# Altium PCB 下板20201119.PCBDOC
Units mm, origin at the board's own origin, x right, y up, seen from the top; angles counter-clockwise.
Board outline 146 x 45 mm, 2 copper layers (Top Layer, Bottom Layer); 4 components, 41 nets, 122 pads, 0 vias.
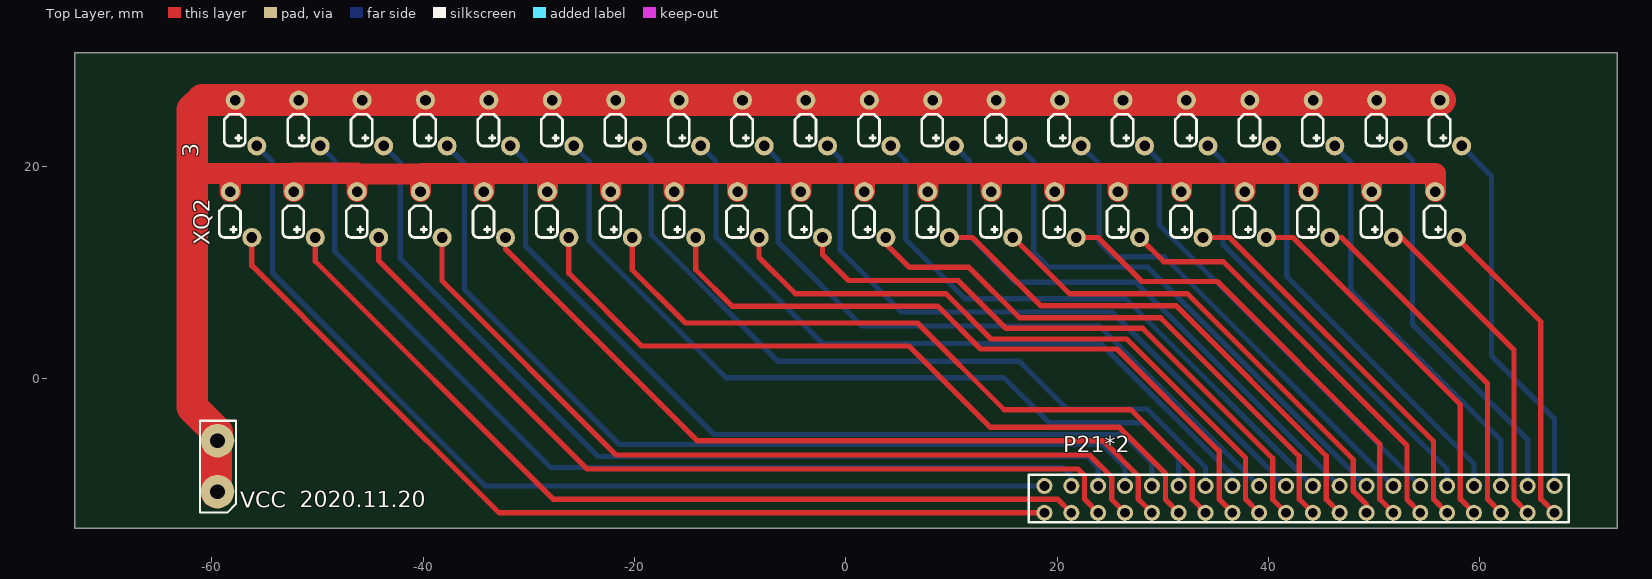
[diagram p0: Top Layer view]
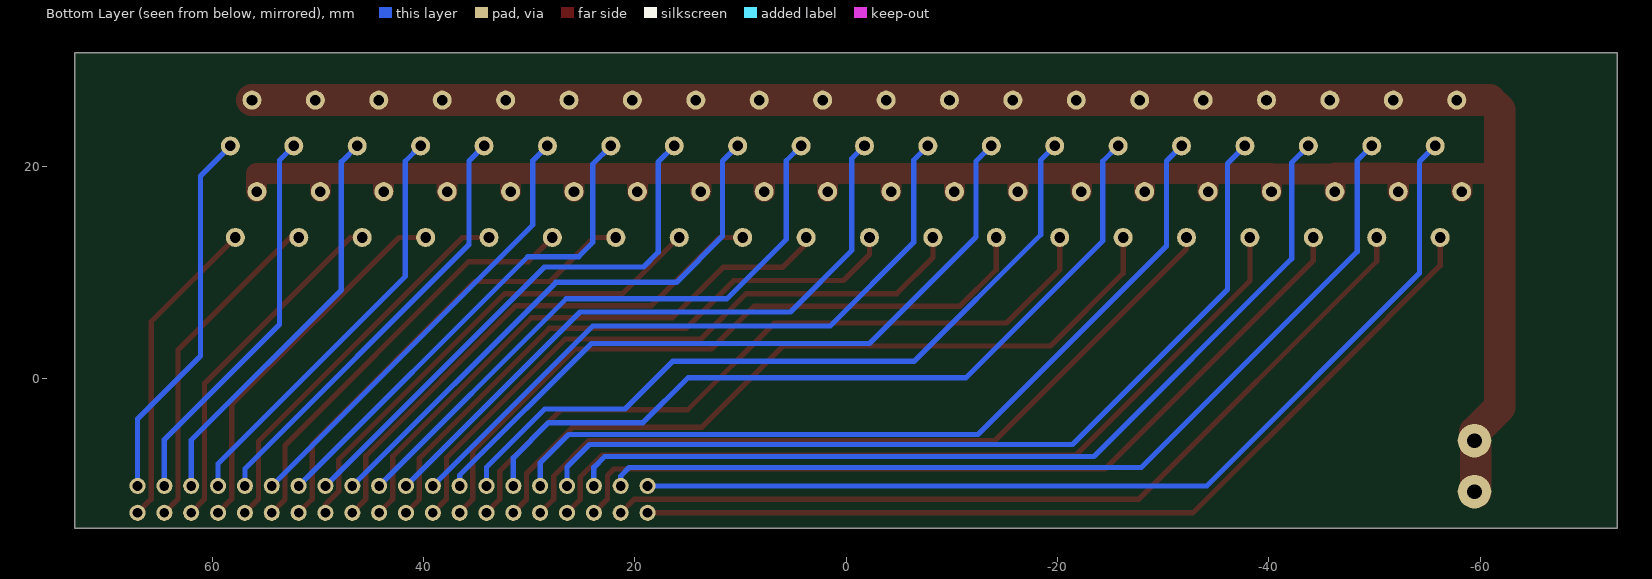
[diagram p1: Bottom Layer view, seen from below]

## Layer stack, top to bottom
Top Solder: solder mask 0.0102, Solder Resist, Dk 3.5
Top Layer: signal copper 0.0356
Dielectric1: dielectric 0.32, FR-4, Dk 4.8
Bottom Layer: signal copper 0.0356
Bottom Solder: solder mask 0.0102, Solder Resist, Dk 3.5

## Board outline
-72.978,-14.199 73.022,-14.199 73.022,30.798 73.023,30.799 -72.977,30.799 -72.978,30.801

## Design rules (kind name [scope] priority, off if disabled: settings)
Clearance [All] p1: gap=0.3 ignorepadtopadclearanceinfootprint=FALSE except(0: Arc-Hole Track-Hole SMDPad-Hole THPad-Hole Via-Hole Fill-Hole Poly-Hole Region-Hole Text-Hole)
FabricationTestPointUsage TestPointUsage [All] p1: valid=0 allowmultiple=FALSE
FabricationTestpoint Testpoint [All] p1: side=3 testpointundercomponent=TRUE minsize=1.016 maxsize=2.54 preferedsize=1.524 minholesize=0 maxholesize=1.016 preferedholesize=0.813 testpointgrid=0.025 allowsidetop=TRUE allowsidebottom=TRUE usegrid=TRUE gridtolerance=0
PolygonConnect [All] p1: connectstyle=Relief reliefconductorwidth=0.254 reliefentries=4 polygonreliefangle="90 Angle" airgapwidth=0.254
RoutingVias [All] p1: holewidth=0.8 width=1.6 viastyle="Through Hole" minholewidth=0.711 minwidth=1.27 maxholewidth=0.711 maxwidth=1.27
SilkToSolderMaskClearance SilkscreenOverComponentPads [IsPad] p1: minsilkscreentomaskgap=0.254 clearancetoexposedcopper=TRUE
SolderMaskExpansion [All] p1: expansion=0.102
Width Width_1 [All] p1: maxlimit=1.27 minlimit=0.254 preferedwidth=0.381 minimp=50.000000 maximp=50.000000 favimp=50.000000
Width [InNet('GND')] p2: maxlimit=1.27 minlimit=0.254 preferedwidth=0.381
27 further rules are at their usual default settings.

## Components (designator, comment, footprint, x,y, rotation, side; value= is the part's Value field where it differs from the comment)
3 "Header 20X2" XIANQUAN1 58.272,21.96 r180 top (schematic designator XQ1)
P21*2 "Header 21X2" XinPian 18.8,-12.751 r180 top
XQ2 "Header 20X2" XIANQUAN1 57.8,13.3 r180 top
? "" N1A -59.45,-5.925 r180 top

## Footprints (in the part's own frame and the unit in brackets; to place one, negate y for a bottom-side part, rotate by r counter-clockwise, add the part's x,y. Pads: shape width x height; smd on the part's side, far side on the other; paste and mask are expansions set on the pad)
N1A [mil]
  round 125 hole 55: 1(0,0) 2(0,190)
  silkscreen extent -69,-74 65,268
XIANQUAN1 [mm]
  round 1.8 hole 1: 1(2.04,-4.34) 2(0,0) 3(8.04,-4.34) 4(6,0) 5(14.04,-4.34) 6(12,0) 7(20.04,-4.34) 8(18,0) 9(26.04,-4.34) 10(24,0) 11(32.04,-4.34) 12(30,0) 13(38.04,-4.34) 14(36,0) 15(44.04,-4.34) 16(42,0) 17(50.04,-4.34) 18(48,0) 19(56.04,-4.34) 20(54,0) 21(62.04,-4.34) 22(60,0) 23(68.04,-4.34) 24(66,0) 25(74.04,-4.34) 26(72,0) 27(80.04,-4.34) 28(78,0) 29(86.04,-4.34) 30(84,0) 31(92.04,-4.34) 32(90,0) 33(98.04,-4.34) 34(96,0) 35(104.04,-4.34) 36(102,0) 37(110.04,-4.34) 38(108,0) 39(116.04,-4.34) 40(114,0)
  silkscreen extent 1.08,-3 117.08,0
XinPian [mil]
  round 60 hole 36: 1(0,-100) 2(-100,-100) 3(-200,-100) 4(-300,-100) 5(-400,-100) 6(-500,-100) 7(-600,-100) 8(-700,-100) 9(-800,-100) 10(-900,-100) 11(-1000,-100) 12(-1100,-100) 13(-1200,-100) 14(-1300,-100) 15(-1400,-100) 16(-1500,-100) 17(-1600,-100) 18(-1700,-100) 19(-1800,-100) 20(-1900,-100) 21(-1900,0) 22(-1800,0) 23(-1700,0) 24(-1600,0) 25(-1500,0) 26(-1400,0) 27(-1300,0) 28(-1200,0) 29(-1100,0) 30(-1000,0) 31(-900,0) 32(-800,0) 33(-700,0) 34(-600,0) 35(-500,0) 36(-400,0) 37(-300,0) 38(-200,0) 39(-100,0) 40(0,0)
  silkscreen extent -1953,-142 59,35

## Part data
3 XQ2: "Header, 20-Pin, Dual row"
P21*2: library part "Header 22X2", "Header, 22-Pin, Dual row"

## Nets (pads, with @x,y where several pads share a name; then routed paths per layer and width w, separated by ;. In a path a pad name is that pad's centre, name@x,y a point inside that pad or via, vN(x,y) a via of type N, cw(c..) or ccw(c..) an arc to the next point about the centre after c; other vN are vias at no path point)
GND: 3.1 3.3 3.5 3.7 3.9 3.11 3.13 3.15 3.17 3.19 3.21 3.23 3.25 3.27 3.29 3.31 3.33 3.35 3.37 3.39 ?.1 ?.2 XQ2.1 XQ2.3 XQ2.5 XQ2.7 XQ2.9 XQ2.11 XQ2.13 XQ2.15 XQ2.17 XQ2.19 XQ2.21 XQ2.23 XQ2.25 XQ2.27 XQ2.29 XQ2.31 XQ2.33 XQ2.35 XQ2.37 XQ2.39 | length 306.9
  Top Layer w1.27: ?.2@-59.575,-10.792 ?.2@-59.406,-10.961 ; ?.1@-59.5,-6.464 ?.1@-59.5,-5.075 ; ?.1@-59.3,-7.053 ?.1@-58.946,-6.699 ; -52.24,19.37 -52.235,19.375 ; -46.24,18.885 -45.805,19.32 ; -46.24,19.375 -45.805,19.375 ; -40.24,19.32 -40.19,19.37 ; -28.305,19.37 -28.24,19.305 ; XQ2.29@-28.25,17.65 XQ2.29 ; XQ2.1 XQ2.1@55.795,17.675
  Top Layer w2: -61.73,19.37 -58.24,19.37 ; XQ2.39 -58.24,19.37 ; XQ2.37 -52.24,19.37 -58.24,19.37 ; -52.235,19.375 -46.24,19.375 ; XQ2.35 -46.24,18.885 ; -45.805,19.32 -40.24,19.32 XQ2.33 ; -40.19,19.37 -34.24,19.37 ; XQ2.31 -34.24,19.37 ; XQ2.29 -28.24,19.305 ; XQ2.27 -22.24,19.22 ; XQ2.25 -16.24,19.25 ; XQ2.23 -10.24,19.37 ; XQ2.21 -4.24,19.37 ; XQ2.19 1.76,19.285 ; XQ2.17 7.76,19.26 ; XQ2.15 13.76,19.155 ; XQ2.13 19.76,19.355 ; XQ2.11 25.76,19.335 ; XQ2.9 31.76,18.935 ; XQ2.7 37.76,19.37 ; XQ2.5@43.8,17.68 43.8,19.35 ; 49.425,19.37 43.8,19.37 37.76,19.37 ; XQ2.3 49.76,19.035 ; 49.76,19.37 55.795,19.37 XQ2.1@55.795,17.675 ; -34.24,19.37 -28.305,19.37 -22.24,19.37 -16.24,19.37 -10.24,19.37 ; -10.24,19.37 -4.24,19.37 ; -4.24,19.37 1.76,19.37 7.76,19.37 13.76,19.37 19.76,19.37 25.76,19.37 31.76,19.37 37.76,19.37
  Top Layer w3: ?.2@-59.575,-10.792 ?.1@-59.575,-6.279 ; ?.1@-59.5,-5.075 -61.825,-2.75 -61.825,19.37 -61.825,25.375 -60.9,26.3 3.39 3.37 3.35 3.33 3.31 3.29 3.27 3.25 3.23 3.21 3.19 3.17 3.15 3.13 3.11 3.9 3.7 3.5 3.3 3.1
XQ1_1: 3.2 P21*2.20 | length 35.8
  Bottom Layer w0.5: 3.2 61.11,19.121 61.11,10.91 61.11,2.088 67.06,-3.861 P21*2.20
XQ1_2: 3.4 P21*2.19 | length 37.2
  Bottom Layer w0.5: 3.4 53.625,20.607 53.625,5.074 64.52,-5.821 P21*2.19
XQ1_3: 3.6 P21*2.18 | length 38.7
  Bottom Layer w0.5: 3.6 47.775,20.457 47.775,8.324 61.98,-5.881 P21*2.18
XQ1_4: 3.8 P21*2.17 | length 40.1
  Bottom Layer w0.5: 3.8 41.725,20.507 41.725,9.604 59.44,-8.111 P21*2.17
XQ1_5: 3.10 P21*2.16 | length 41.5
  Bottom Layer w0.5: 3.10 35.7,20.532 35.7,12.619 56.9,-8.581 P21*2.16
XQ1_6: 3.12 P21*2.15 | length 43
  Bottom Layer w0.5: 3.12 29.65,20.581 29.65,14.498 P21*2.15
XQ1_7: 3.14 P21*2.14 | length 47.2
  Bottom Layer w0.5: 3.14 23.98,20.251 23.98,15.699 23.98,13.7 23.98,12.818 25.324,11.475 30.134,11.475 P21*2.14
XQ1_8: 3.16 P21*2.13 | length 51.3
  Bottom Layer w0.5: 3.16 17.8,20.432 17.8,11.899 19.199,10.5 28.569,10.5 P21*2.13
XQ1_9: 3.18 P21*2.12 | length 54
  Bottom Layer w0.5: 3.18 11.7,20.532 11.7,13.425 16.075,9.05 27.479,9.05 P21*2.12
XQ1_10: 3.20 P21*2.11 | length 57.6
  Bottom Layer w0.5: 3.20 5.675,20.557 5.675,13.124 11.299,7.5 26.489,7.5 P21*2.11
XQ1_11: 3.22 P21*2.10 | length 61.8
  Bottom Layer w0.5: 3.22 -0.525,20.757 -0.525,12.064 5.289,6.25 25.199,6.25 P21*2.10
XQ1_12: 3.24 P21*2.9 | length 64.7
  Bottom Layer w0.5: 3.24 -6.375,20.607 -6.375,12.814 1.514,4.925 23.984,4.925 P21*2.9
XQ1_13: 3.26 P21*2.8 | length 68.4
  Bottom Layer w0.5: 3.26 -12.275,20.507 -12.275,13.354 -2.196,3.275 24.1,3.275 36.58,-9.205 P21*2.8
XQ1_14: 3.28 P21*2.7 | length 72.3
  Bottom Layer w0.5: 3.28 -18.4,20.632 -18.4,13.559 -6.416,1.575 16.425,1.575 20.925,-2.925 28.525,-2.925 34.04,-8.44 P21*2.7
XQ1_15: 3.30 P21*2.6 | length 76.5
  Bottom Layer w0.5: 3.30 -24.275,20.507 -24.275,12.964 -11.336,0.025 14.975,0.025 19.225,-4.225 28.175,-4.225 31.5,-7.55 P21*2.6
XQ1_16: 3.32 P21*2.5 | length 80
  Bottom Layer w0.5: 3.32 -30.3,20.532 -30.3,12.475 -12.475,-5.35 26.275,-5.35 28.96,-8.035 P21*2.5
XQ1_17: 3.34 P21*2.4 | length 85.5
  Bottom Layer w0.5: 3.34 -36.075,20.307 -36.075,8.375 -21.4,-6.3 24.3,-6.3 26.42,-8.42 P21*2.4
XQ1_18: 3.36 P21*2.3 | length 87.3
  Bottom Layer w0.5: 3.36 -42.16,20.391 -42.16,11.299 -23.436,-7.425 22.85,-7.425 23.88,-8.455 P21*2.3
XQ1_19: 3.38 P21*2.2 | length 90
  Bottom Layer w0.5: 3.38 -48.35,20.582 -48.35,11.959 -27.916,-8.475 20.55,-8.475 21.34,-9.265 P21*2.2
XQ1_20: 3.40 P21*2.1 | length 94
  Bottom Layer w0.5: 3.40 -54.25,20.482 -54.25,9.92 -34.118,-10.211 P21*2.1
XQ2_1: P21*2.21 XQ2.2 | length 29.9
  Top Layer w0.5: XQ2.2 65.773,5.328 65.773,-11.464 P21*2.21
XQ2_2: P21*2.22 XQ2.4 | length 31.8
  Top Layer w0.381: XQ2.4 XQ2.4@52.6,13.3
  Top Layer w0.5: XQ2.4@52.6,13.3 63.233,2.667 63.233,-11.464 P21*2.22
XQ2_3: P21*2.23 XQ2.6 | length 33.4
  Top Layer w0.381: P21*2.23 P21*2.23@61.98,-12.716
  Top Layer w0.5: XQ2.6 46.925,13.3 60.728,-0.503 60.728,-11.464 P21*2.23@61.98,-12.716
XQ2_4: P21*2.24 XQ2.8 | length 35.7
  Top Layer w0.5: XQ2.8 42.325,13.3 58.153,-2.528 58.153,-11.464 P21*2.24
XQ2_5: P21*2.25 XQ2.10 | length 37.1
  Top Layer w0.5: XQ2.10 36.325,13.3 55.613,-5.988 55.613,-11.464 P21*2.25
XQ2_6: P21*2.26 XQ2.12 | length 40.3
  Top Layer w0.5: XQ2.12 30.1,11 35.725,11 53.1,-6.375 53.1,-11.491 P21*2.26
XQ2_7: P21*2.27 XQ2.14 | length 43.9
  Top Layer w0.5: XQ2.14 23.85,13.3 28.025,9.125 35.174,9.125 50.533,-6.234 50.533,-11.464 P21*2.27
XQ2_8: P21*2.28 XQ2.16 | length 47.2
  Top Layer w0.381: XQ2.16@15.8,12.65 XQ2.16@15.8,13.35
  Top Layer w0.5: XQ2.16@15.8,13.35 21.175,7.975 32.325,7.975 48.028,-7.728 48.028,-10.73 49.28,-11.982 P21*2.28
XQ2_9: P21*2.29 XQ2.18 | length 50.1
  Top Layer w0.5: XQ2.18 11.975,13.3 18.425,6.85 31.249,6.85 45.453,-7.354 45.453,-11.464 P21*2.29
XQ2_10: P21*2.30 XQ2.20 | length 53.9
  Top Layer w0.381: XQ2.20@3.8,12.7 XQ2.20
  Top Layer w0.5: XQ2.20@3.8,12.7 6.025,10.475 11.662,10.475 16.433,5.704 29.795,5.704 42.913,-7.414 42.913,-11.464 P21*2.30
XQ2_11: P21*2.31 XQ2.22 | length 57.9
  Top Layer w0.5: XQ2.22 -2.2,11.701 0.276,9.225 10.637,9.225 15.162,4.7 28.099,4.7 40.4,-7.601 40.4,-11.491 P21*2.31
XQ2_12: P21*2.32 XQ2.24 | length 61.5
  Top Layer w0.5: XQ2.24 -8.2,11.401 -4.774,7.975 9.475,7.975 13.75,3.7 26.585,3.7 37.833,-7.548 37.833,-11.464 P21*2.32
XQ2_13: P21*2.33 XQ2.26 | length 66
  Top Layer w0.381: P21*2.33 P21*2.33@36.58,-12.716
  Top Layer w0.5: XQ2.26 -14.2,10.25 -10.75,6.8 8.7,6.8 12.75,2.75 25.649,2.75 35.328,-6.929 35.328,-11.464 P21*2.33@36.58,-12.716
XQ2_14: P21*2.34 XQ2.28 | length 68.4
  Top Layer w0.381: P21*2.34 P21*2.34@34.04,-12.716
  Top Layer w0.5: XQ2.28 -20.2,10.24 -15.747,5.787 -15.16,5.2 6.8,5.2 15,-3 27,-3 32.788,-8.788 32.788,-11.464 P21*2.34@34.04,-12.716
XQ2_15: P21*2.35 XQ2.30 | length 71.9
  Top Layer w0.5: XQ2.30 -26.2,9.91 -19.315,3.025 5.975,3.025 13.65,-4.65 25.849,-4.65 30.248,-9.049 30.248,-11.499 P21*2.35
XQ2_16: P21*2.36 XQ2.32 | length 73.9
  Top Layer w0.5: XQ2.32 -32.2,12.2 -14.075,-5.925 24.324,-5.925 27.673,-9.274 27.673,-11.464 P21*2.36
XQ2_17: P21*2.37 XQ2.34 | length 79.1
  Top Layer w0.5: XQ2.34 -38.2,9.2 -21.725,-7.275 23.074,-7.275 25.168,-9.369 25.168,-11.499 P21*2.37
XQ2_18: P21*2.38 XQ2.36 | length 81.5
  Top Layer w0.5: XQ2.36 -44.2,11.12 -24.478,-8.601 21.976,-8.601 22.593,-9.218 22.593,-11.464 P21*2.38
XQ2_19: P21*2.39 XQ2.38 | length 83.6
  Top Layer w0.5: XQ2.38 -50.2,11.05 -27.686,-11.464 20.053,-11.464 P21*2.39
XQ2_20: P21*2.40 XQ2.40 | length 87.4
  Top Layer w0.5: XQ2.40 -56.2,10.63 -46.296,0.726 -32.818,-12.751 P21*2.40

## Silkscreen, mask and mechanical layers (free items; w line width, h text height)
Top Overlay:
  text "2020.11.20" at -51.65,-12.25 h1.52
  text "VCC" at -57.3,-12.275 h1.52
Mechanical 1:
  circle w0.01: c31.75,22 r0.5
  circle w0.01: c-34.25,22 r0.5
  circle w0.254: c24,0 r1.5
  circle w0.254: c-24,0 r1.5
  circle w0.254: c67.5,25 r1.5
  circle w0.254: c67.5,19.5 r1.5
  circle w0.254: c67.5,14 r1.5
  circle w0.254: c-67.5,14 r1.5
  circle w0.254: c-67.5,19.5 r1.5
  circle w0.254: c-67.5,25 r1.5
  circle w0.01: c-55.75,17 r0.5
  circle w0.01: c-49.75,17 r0.5
  circle w0.01: c-52.25,22 r0.5
  circle w0.01: c-43.75,17 r0.5
  circle w0.01: c-46.25,22 r0.5
  circle w0.01: c-37.75,17 r0.5
  circle w0.01: c-40.25,22 r0.5
  circle w0.01: c-31.75,17 r0.5
  circle w0.01: c-25.75,17 r0.5
  circle w0.01: c-28.25,22 r0.5
  circle w0.01: c-19.75,17 r0.5
  circle w0.01: c-22.25,22 r0.5
  circle w0.01: c-13.75,17 r0.5
  circle w0.01: c-16.25,22 r0.5
  circle w0.01: c-7.75,17 r0.5
  circle w0.01: c-10.25,22 r0.5
  circle w0.01: c58.25,17 r0.5
  circle w0.01: c55.75,22 r0.5
  circle w0.01: c52.25,17 r0.5
  circle w0.01: c49.75,22 r0.5
  circle w0.01: c46.25,17 r0.5
  circle w0.01: c43.75,22 r0.5
  circle w0.01: c40.25,17 r0.5
  circle w0.01: c37.75,22 r0.5
  circle w0.01: c34.25,17 r0.5
  circle w0.01: c28.25,17 r0.5
  circle w0.01: c25.75,22 r0.5
  circle w0.01: c22.25,17 r0.5
  circle w0.01: c19.75,22 r0.5
  circle w0.01: c16.25,17 r0.5
  circle w0.01: c13.75,22 r0.5
  circle w0.01: c10.25,17 r0.5
  circle w0.01: c7.75,22 r0.5
  circle w0.01: c4.25,17 r0.5
  circle w0.01: c1.75,22 r0.5
  circle w0.01: c-4.25,22 r0.5
  circle w0.01: c-1.75,17 r0.5
  circle w0.01: c-58.25,22 r0.5
  lines w0.508: -72.978,30.801 -72.978,-14.199 73.022,-14.199 ; -72.977,30.799 73.023,30.799 ; 73.022,-14.202 73.022,30.798